# EAGLE board badge_mil (EAGLE 7.1.0)
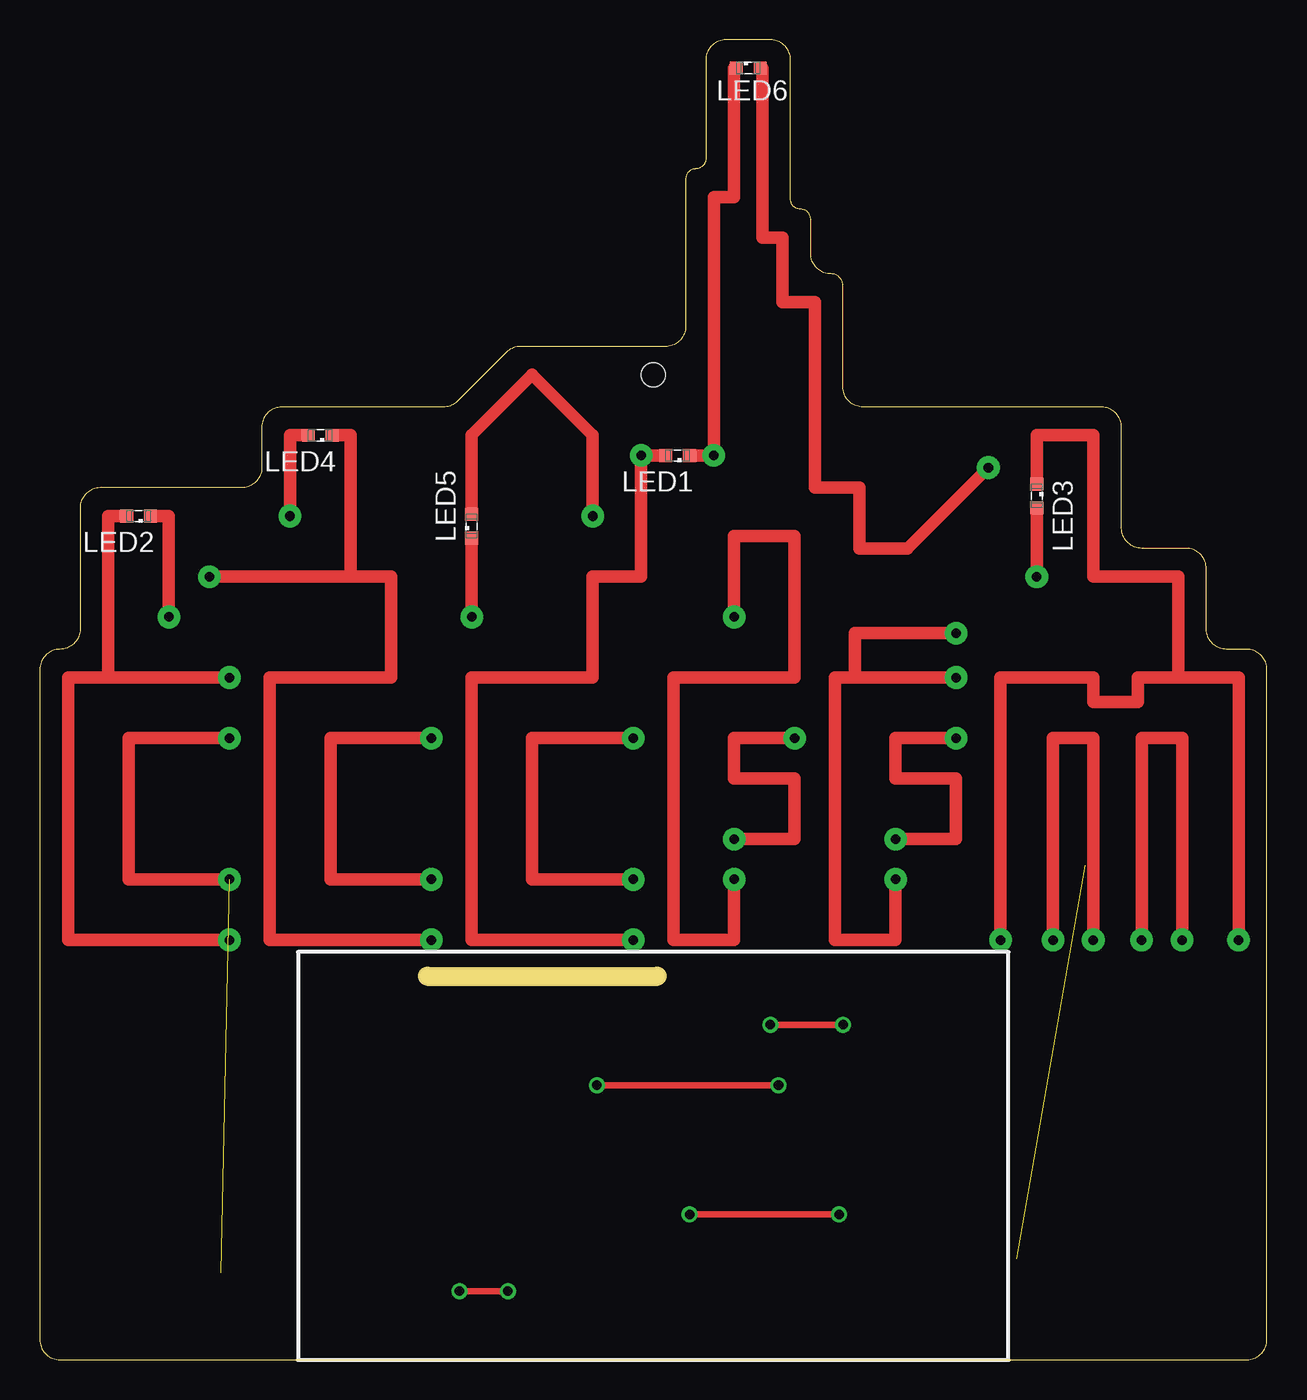
[diagram p0: board, top side]
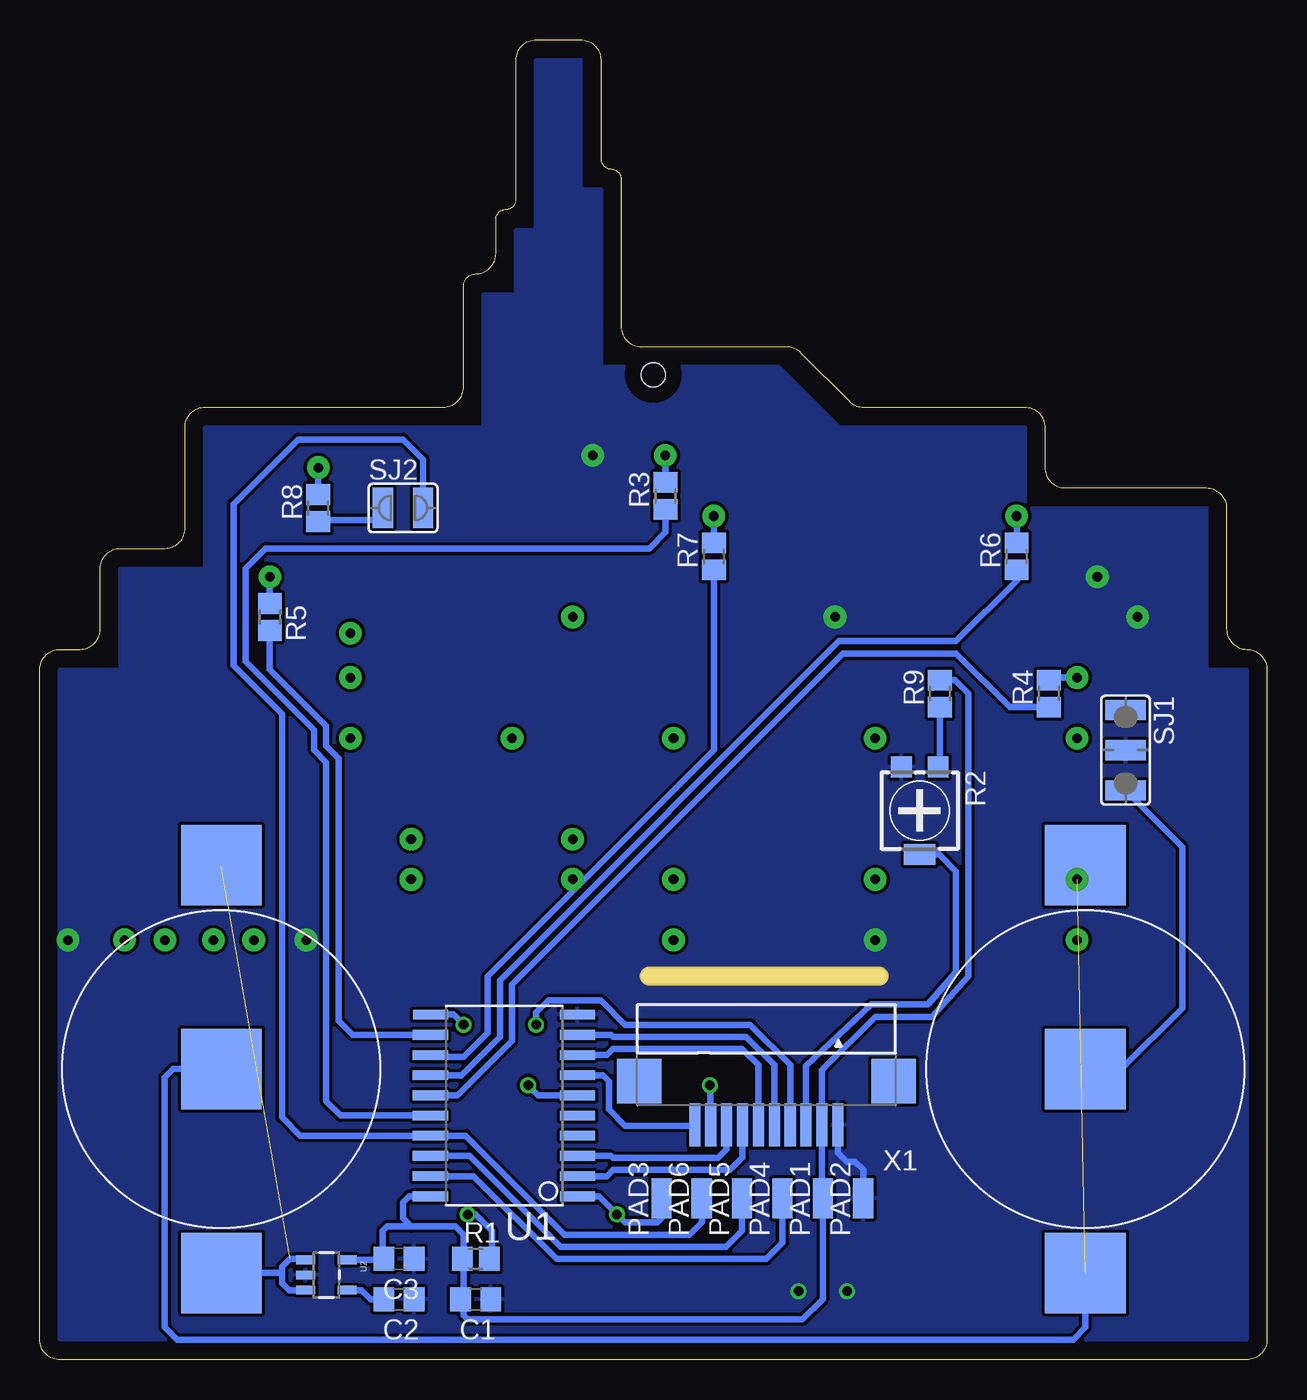
[diagram p1: board, bottom side, seen from below]

Size 77.22 x 83.06 mm. Coordinates in mm from the lower left corner, seen from the top.
Outline: 40.64,74.3 40.64,65.02 arc-90 39.37,63.75 30.24,63.75 arc45 29.35,63.38 26.28,60.32 arc-45 25.38,59.94 15.24,59.94 arc90 13.97,58.67 13.97,56.13 arc-90 12.7,54.86 3.81,54.86 arc90 2.54,53.59 2.54,45.97 arc-90 1.27,44.7 arc90 0,43.43 0,1.27 arc90 1.27,0 75.95,0 arc90 77.22,1.27 77.22,43.43 arc90 75.95,44.7 74.68,44.7 arc-90 73.41,45.97 73.41,49.78 arc90 72.14,51.05 69.34,51.05 arc-90 68.07,52.32 68.07,58.67 arc90 66.8,59.94 51.82,59.94 arc-90 50.55,61.21 50.55,67.56 arc90 49.78,68.33 arc-90 48.51,69.6 48.51,71.75 arc90 47.88,72.39 arc-90 47.24,73.03 47.24,81.79 arc90 45.97,83.06 43.18,83.06 arc90 41.91,81.79 41.91,75.56 arc-90 41.27,74.93 arc90 40.64,74.3
Copper layers (1*16): Top 0.035mm / dielectric 1.5mm / Bottom 0.035mm
Design rules "default *": minimum track width 10mil, minimum drill 6mil, track to track 8mil, track to pad 8mil, pad to pad 8mil, via to via 8mil, smd to smd 5mil, copper to edge 40mil, drill to drill 8mil, minimum pad ring 10mil, minimum via ring 8mil, stop-mask expansion 8mil, vias tented up to drill 0mil, thermal gap 8mil
Holes 1.5 mm at 38.61,61.98
Milling: 1 lines

## Footprints (pad centres in the part's own frame; a part is rotated, then mirrored left to right if it is on the bottom)
C0805 = smd 1.3 x 1.5: 1 -0.95,0; 2 0.95,0
KEYSTONE3002 = smd 5.08 x 5.08: V+1 -12.827,0; V+2 12.827,0; V- 0,0
SML0603 = smd 0.8 x 0.8: A 0.75,0; C -0.75,0
SMD1,27-2,54 = smd 1.27 x 2.54: 1 0,0
R0805 = smd 1.3 x 1.5: 1 -0.85,0; 2 0.85,0
RTRIM4G/J = smd 1.3 x 1.3: 1 -1.15,-2.75; 3 1.15,-2.75 | smd 2 x 1.3: 2 0,2.75
SJ_2W = smd 1.27 x 2.54: 1 -2.54,0; 2 0,0; 3 2.54,0
SJW = smd 1.27 x 2.54: 1 -1.27,0; 2 1.27,0
SO20L$ = smd 0.61 x 2.21: 1 -5.715,-4.636; 2 -4.445,-4.636; 3 -3.175,-4.636; 4 -1.905,-4.636; 5 -0.635,-4.636; 6 0.635,-4.636; 7 1.905,-4.636; 8 3.175,-4.636; 9 4.445,-4.636; 10 5.715,-4.636; 11 5.715,4.61; 12 4.445,4.636; 13 3.175,4.636; 14 1.905,4.636; 15 0.635,4.636; 16 -0.635,4.636; 17 -1.905,4.636; 18 -3.175,4.636; 19 -4.445,4.636; 20 -5.715,4.636
SOT23-5 = smd 0.55 x 1.2: 1 -0.95,-1.3; 2 0,-1.3; 3 0.95,-1.3; 4 0.95,1.3; 5 -0.95,1.3
FH12-10S-1.0SH = smd 0.7 x 2.7: 1 -4.5,2.75; 2 -3.5,2.75; 3 -2.5,2.75; 4 -1.5,2.75; 5 -0.5,2.75; 6 0.5,2.75; 7 1.5,2.75; 8 2.5,2.75; 9 3.5,2.75; 10 4.5,2.75 | smd 2.8 x 2.8: P$1 -8,0; P$2 8,0

## Placement (x,y rotation side)
C1  100 nF  [C0805]  49.78,3.81 180 bottom
C2  470 pF  [C0805]  54.61,3.81 180 bottom
C3  2,2 µF  [C0805]  54.61,6.35 180 bottom
CLIP1  KEYSTONE3002  [KEYSTONE3002]  11.43,18.29 270 bottom
CLIP2  KEYSTONE3002  [KEYSTONE3002]  65.79,18.29 270 bottom
LED1  Rot  [SML0603]  40.13,56.9 180 top
LED2  Gelb  [SML0603]  6.22,53.09 180 top
LED3  Rot  [SML0603]  62.74,54.36 270 top
LED4  Gelb  [SML0603]  17.65,58.17 180 top
LED5  Grün  [SML0603]  27.18,52.45 90 top
LED6  Grün  [SML0603]  44.58,81.28 0 top
PAD1  WIREPADSMD1,27-254  [SMD1,27-2,54]  27.94,10.16 0 bottom
PAD2  WIREPADSMD1,27-254  [SMD1,27-2,54]  25.4,10.16 0 bottom
PAD3  WIREPADSMD1,27-254  [SMD1,27-2,54]  38.1,10.16 0 bottom
PAD4  WIREPADSMD1,27-254  [SMD1,27-2,54]  30.48,10.16 0 bottom
PAD5  WIREPADSMD1,27-254  [SMD1,27-2,54]  33.02,10.16 0 bottom
PAD6  WIREPADSMD1,27-254  [SMD1,27-2,54]  35.56,10.16 0 bottom
R1  10k  [R0805]  49.78,6.35 0 bottom
R2  10k  [RTRIM4G/J]  21.84,34.54 180 bottom
R3  1k6  [R0805]  37.85,54.36 90 bottom
R4  1k6  [R0805]  13.72,41.91 90 bottom
R5  1k6  [R0805]  62.74,46.74 270 bottom
R6  1k6  [R0805]  15.75,50.55 90 bottom
R7  1k6  [R0805]  34.8,50.55 90 bottom
R8  1k6  [R0805]  59.69,53.59 90 bottom
R9  1k6  [R0805]  20.57,41.91 90 bottom
SJ1  [SJ_2W]  8.89,38.35 270 bottom
SJ2  [SJW]  54.36,53.59 0 bottom
U1  TINY2313-*S*  [SO20L$]  48.01,16 90 bottom
U2  MC5205  [SOT23-5]  59.18,5.33 270 bottom
X1  FH12-10S-0.5S  [FH12-10S-1.0SH]  31.5,17.53 180 bottom

## Library data of the parts
C1-C3 = rcl
CLIP1 CLIP2 = draradech
LED1-LED6 = led
PAD1-PAD6 = wirepad
R1 R3-R9 = resistor; SPICEPREFIX: R
R2 = resistor
SJ1 SJ2 = jumper
U1 = avr-6
U2 = SparkFun-PowerIC; PROD_ID: VREG-00823
X1 = con-hirose

## Nets
GND: C1.1 C2.1 C3.1 LED1.C LED2.C LED3.C LED4.C LED5.C LED6.C PAD2.1 R2.3 SJ1.2 U1.10 U2.2 X1.1
N$1: PAD3.1 R1.2 U1.1
N$2: PAD5.1 U1.18
N$3: PAD6.1 SJ2.2 U1.17
N$4: PAD4.1 U1.19
N$5: LED6.A R8.2
N$6: LED5.A R7.2
N$7: LED4.A R6.2
N$8: CLIP1.V+1 CLIP1.V+2 CLIP2.V-
N$9: LED1.A R3.2
N$10: R3.1 U1.16
N$11: R4.1 U1.15
N$12: R6.1 U1.14
N$13: R7.1 U1.13
N$14: U1.2 X1.7
N$15: U1.3 X1.8
N$16: U1.6 X1.9
N$17: U1.7 X1.10
N$18: U1.8 X1.6
N$19: U1.9 X1.5
N$20: U1.11 X1.4
N$21: R2.1 R9.1
N$23: CLIP1.V- SJ1.3
N$24: R8.1 SJ2.1
N$28: C2.2 U2.4
N$29: CLIP2.V+1 CLIP2.V+2 U2.1 U2.3
N$36: LED2.A R4.2
N$39: LED3.A R5.1
N$40: R5.2 U1.12
N$42: R2.2 X1.3
VCC: C1.2 C3.2 PAD1.1 R1.1 R9.2 U1.20 U2.5 X1.2

## Tracks (layer width: path | path; a pad name or v marks a point on that pad's centre or on a via)
GND  (via drill 0.6, 0.6 pad 1.42)
  Top 0.406: v29.46,4.32 v26.42,4.32
  Top 0.8: LED3.C 62.74,58.17 66.29,58.17 66.29,49.28 71.63,49.28 71.63,42.93 | LED5.C v27.18,46.74 | 10.67,49.27 v10.67,49.28 19.56,49.28 | v24.64,26.42 14.48,26.42 14.48,42.93 22.1,42.93 22.1,49.28 19.56,49.28 | LED4.C 19.56,58.17 19.56,49.28 | v75.44,26.42 75.44,42.93 71.63,42.93 | LED2.C 8.13,53.09 v8.13,46.74 | 71.63,42.93 69.09,42.93 69.09,41.4 66.29,41.4 66.29,42.93 60.45,42.93 v60.45,26.42 | LED1.C v42.42,56.9 42.42,73.15 43.69,73.15 43.69,81.28 LED6.C
  Bottom 0.406: PAD2.1 25.4,11.94 25.91,12.45 26.42,12.45 27,13.03 X1.1
  pour Bottom: 1.27,1.27 75.95,1.27 75.95,43.43 72.14,43.43 72.14,49.78 66.8,49.78 66.8,58.67 49.28,58.67 49.28,67.06 47.24,67.06 47.24,71.12 45.97,71.12 45.97,81.79 43.18,81.79 43.18,73.66 41.91,73.66 41.91,62.48 30.73,62.48 26.92,58.67 15.24,58.67 15.24,53.59 3.81,53.59 3.81,43.43 1.27,43.43
N$1  (via drill 0.6)
  Top 0.406: v50.29,9.14 v40.89,9.14
  Bottom 0.406: 38.1,10.29 PAD3.1 38.1,8.89 38.35,8.64 40.39,8.64 v40.89,9.14 42.04,10.29 U1.1 | R1.2 48.77,6.35 48.77,8.13 49.78,9.14 v50.29,9.14
N$2
  Bottom 0.406: U1.18 50.16,12.83 44.45,7.11 34.04,7.11 33.02,8.13 PAD5.1
N$3
  Bottom 0.406: PAD6.1 35.56,8.64 36.32,7.87 44.2,7.87 50.42,14.1 U1.17 60.83,14.1 61.98,15.24 61.98,40.64 65.02,43.69 65.02,53.85 60.96,57.91 54.36,57.91 53.09,56.64 SJ2.2
N$4
  Bottom 0.406: U1.19 49.91,11.56 44.7,6.35 31.5,6.35 30.48,7.37 PAD4.1
N$5  (via drill 0.6 pad 1.42)
  Top 0.8: LED6.A 45.47,81.28 45.47,70.61 46.74,70.61 46.74,66.55 48.77,66.55 48.77,54.86 51.56,54.86 51.56,51.05 54.61,51.05 v59.69,56.13
  Bottom 0.406: R8.2 v59.69,56.13
N$6  (via drill 0.6 pad 1.42)
  Top 0.8: LED5.A 27.18,58.17 | 27.19,58.1 27.18,58.17 | 27.18,58.17 30.99,61.98 34.8,58.17 v34.8,53.09
  Bottom 0.406: R7.2 v34.8,53.09
N$7  (via drill 0.6 pad 1.42)
  Top 0.8: LED4.A 15.75,58.17 v15.75,53.09
  Bottom 0.406: R6.2 v15.75,53.09
N$8  (via drill 0.6 pad 1.42)  (1 unrouted)
  Top 0.8: v11.94,39.12 5.59,39.12 5.59,30.23 v11.94,30.23
  Bottom 0.406: CLIP2.V- 68.83,18.29 69.34,17.78 69.34,2.03 68.58,1.27 12.19,1.27 11.43,2.03 CLIP1.V+2 | CLIP1.V+1 11.94,30.61 v11.94,30.23
N$9  (via drill 0.6 pad 1.42)
  Top 0.8: LED1.A v37.85,56.9 37.85,49.28 34.8,49.28 34.8,42.93 27.18,42.93 27.18,26.42 v37.34,26.42
  Bottom 0.406: R3.2 v37.85,56.9
N$10
  Bottom 0.406: U1.16 58.29,15.37 59.18,16.26 59.18,37.59 59.94,38.35 59.94,39.62 64.26,43.94 64.26,49.78 62.99,51.05 38.86,51.05 37.85,52.07 R3.1
N$11
  Bottom 0.406: U1.15 50.93,16.64 47.5,20.07 47.5,23.62 26.67,44.45 19.56,44.45 16.17,41.06 R4.1
N$12
  Bottom 0.406: U1.14 50.67,17.91 48.26,20.32 48.26,23.88 26.92,45.21 19.56,45.21 15.75,49.02 R6.1
N$13  (via drill 0.6 pad 1.42)
  Top 0.8: v43.69,30.23 43.69,26.42 39.88,26.42 39.88,42.93 47.5,42.93 47.5,51.82 43.69,51.82 v43.69,46.74
  Bottom 0.406: U1.13 53.53,19.05 50.55,19.05 49.02,20.57 49.02,24.13 42.93,30.23 | R7.1 34.8,38.35 42.93,30.23 | 42.93,30.23 v43.69,30.23
N$14
  Bottom 0.406: U1.2 41.53,11.56 41.15,11.94 33.78,11.94 33,12.72 X1.7
N$15
  Bottom 0.406: X1.8 34,13.25 34.54,12.7 41.15,12.7 41.27,12.83 U1.3
N$16  (via drill 0.6)
  Top 0.406: v35.05,17.27 v46.48,17.27
  Bottom 0.406: v46.48,17.27 45.85,16.64 U1.6 | X1.9 35,17.22 v35.05,17.27
N$17
  Bottom 0.406: X1.10 36.04,14.73 40.39,14.73 41.4,15.75 41.4,17.53 41.78,17.91 U1.7
N$18
  Bottom 0.406: X1.6 32,18.54 33.02,19.56 41.15,19.56 41.53,19.18 U1.8
N$19
  Bottom 0.406: X1.5 30.99,14.78 30.99,18.54 32.77,20.32 41.15,20.32 41.27,20.45 U1.9
N$20  (via drill 0.6)
  Top 0.406: v45.97,21.08 v50.55,21.08
  Bottom 0.406: X1.4 29.97,14.8 29.97,18.54 32.51,21.08 40.39,21.08 41.91,22.61 45.21,22.61 45.97,21.84 v45.97,21.08 | v50.55,21.08 51.18,21.72 U1.11
N$21
  Bottom 0.406: R9.1 20.57,37.59 20.69,37.47 R2.1
N$23
  Bottom 0.406: CLIP1.V- 9.14,18.29 5.33,22.1 5.33,32.26 SJ1.3
N$24
  Bottom 0.406: SJ2.1 55.63,52.83 59.6,52.83 R8.1
N$25  (via drill 0.6 pad 1.42)
  Top 0.8: v24.64,30.23 18.29,30.23 18.29,39.12 v24.64,39.12
N$27  (via drill 0.6 pad 1.42)
  Top 0.8: v37.34,30.23 30.99,30.23 30.99,39.12 v37.34,39.12
N$28
  Bottom 0.406: U2.4 56.96,4.38 56.39,3.81 C2.2
N$29  (1 unrouted)
  Bottom 0.406: U2.3 61.53,4.38 61.98,4.83 61.98,5.33 | 61.98,5.33 61.98,5.84 61.47,6.35 60.55,6.35 U2.1 | CLIP2.V+2 62.1,5.46 61.98,5.33
N$30  (via drill 0.6 pad 1.42)
  Top 0.8: v43.69,32.77 47.5,32.77 47.5,36.58 43.69,36.58 43.69,39.12 v47.5,39.12
N$31  (via drill 0.6 pad 1.42)
  Top 0.8: v53.85,30.23 53.85,26.42 50.04,26.42 50.04,42.93 51.31,42.93 | 51.31,42.93 v57.66,42.93 | 51.31,42.93 51.31,45.72 v57.66,45.72
N$32  (via drill 0.6 pad 1.42)
  Top 0.8: v53.85,32.77 57.66,32.77 57.66,36.58 53.85,36.58 53.85,39.12 v57.66,39.12
N$34  (via drill 0.6 pad 1.42)
  Top 0.8: v63.75,26.42 63.75,39.12 66.29,39.12 v66.29,26.42
N$35  (via drill 0.6 pad 1.42)
  Top 0.8: v69.34,26.42 69.34,39.12 71.88,39.12 v71.88,26.42
N$36  (via drill 0.6 pad 1.42)
  Top 0.8: v11.94,26.42 1.78,26.42 1.78,42.93 4.32,42.93 | 4.32,42.93 v11.94,42.93 | LED2.A 4.32,53.09 4.32,42.93
  Bottom 0.406: v11.94,42.93 13.55,42.93 R4.2
N$39  (via drill 0.6 pad 1.42)
  Top 0.8: v62.74,49.28 LED3.A
  Bottom 0.406: R5.1 v62.74,49.28
N$40
  Bottom 0.406: U1.12 57.53,20.45 58.42,21.34 58.42,37.85 59.18,38.61 59.18,39.88 62.74,43.43 R5.2
N$42
  Bottom 0.406: X1.3 29,18.5 24.89,22.35 21.34,22.35 19.56,24.38 19.56,30.73 20.62,31.79 R2.2
VCC
  Bottom 0.406: 53.21,10.29 U1.20 53.98,10.29 54.36,9.91 54.36,8.89 53.85,8.38 | 50.55,4.06 50.55,2.79 50.29,2.54 29.21,2.54 27.94,3.81 PAD1.1 27.94,10.67 28,10.72 X1.2 28,18.23 24.64,21.59 21.08,21.59 18.8,24.13 18.8,41.91 19.65,42.76 R9.2 | 50.55,4.13 C1.2 50.55,4.06 | R1.1 50.55,6.35 | 50.55,6.35 50.55,4.13 | 50.55,4.13 50.55,4.06 | 50.55,6.35 50.55,7.87 51.05,8.38 53.85,8.38 | U2.5 55.63,6.28 C3.2 55.63,6.42 55.63,8.13 55.37,8.38 53.85,8.38